# Altium PCB Lab6.PcbDoc
Units mil, origin at the board's own origin, x right, y up, seen from the top; angles counter-clockwise.
Board outline 1665 x 2270 mil, 2 copper layers (Top Layer, Bottom Layer); 68 components, 46 nets, 196 pads, 69 vias.
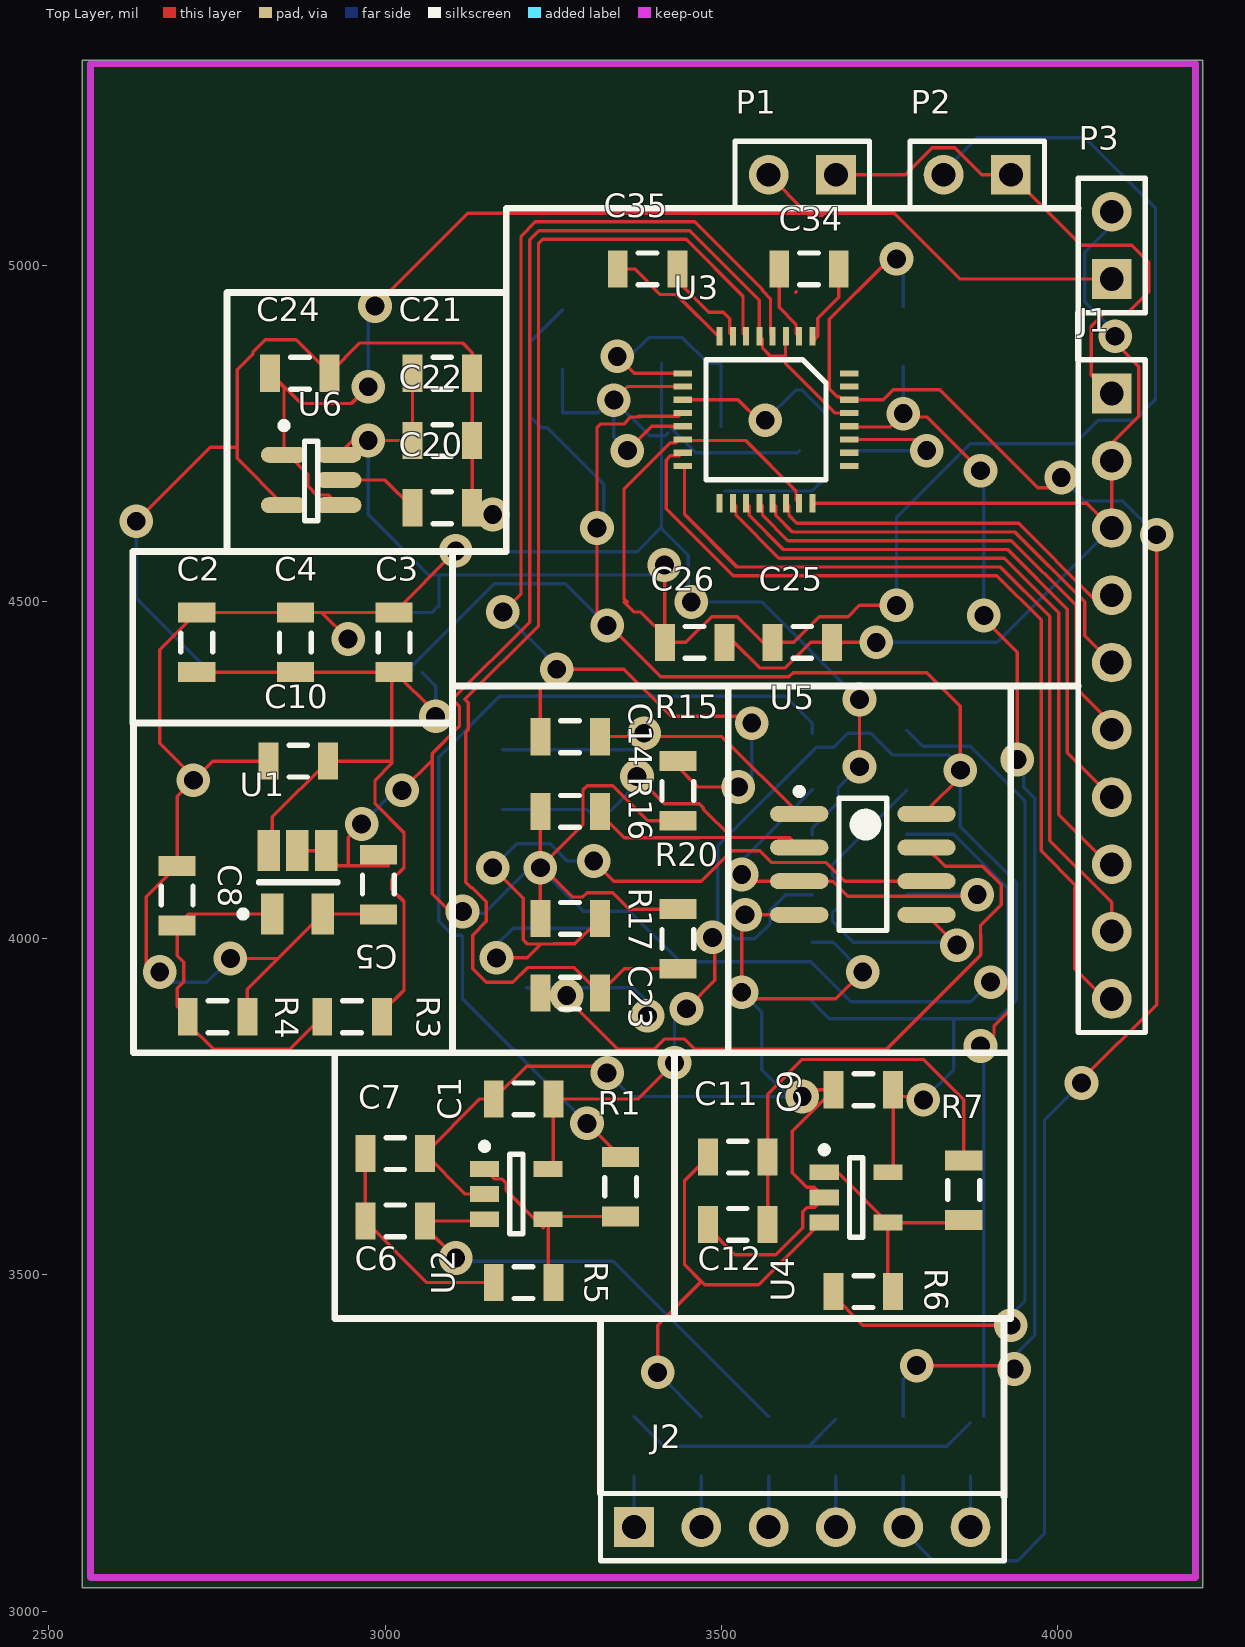
[diagram p0: Top Layer view]
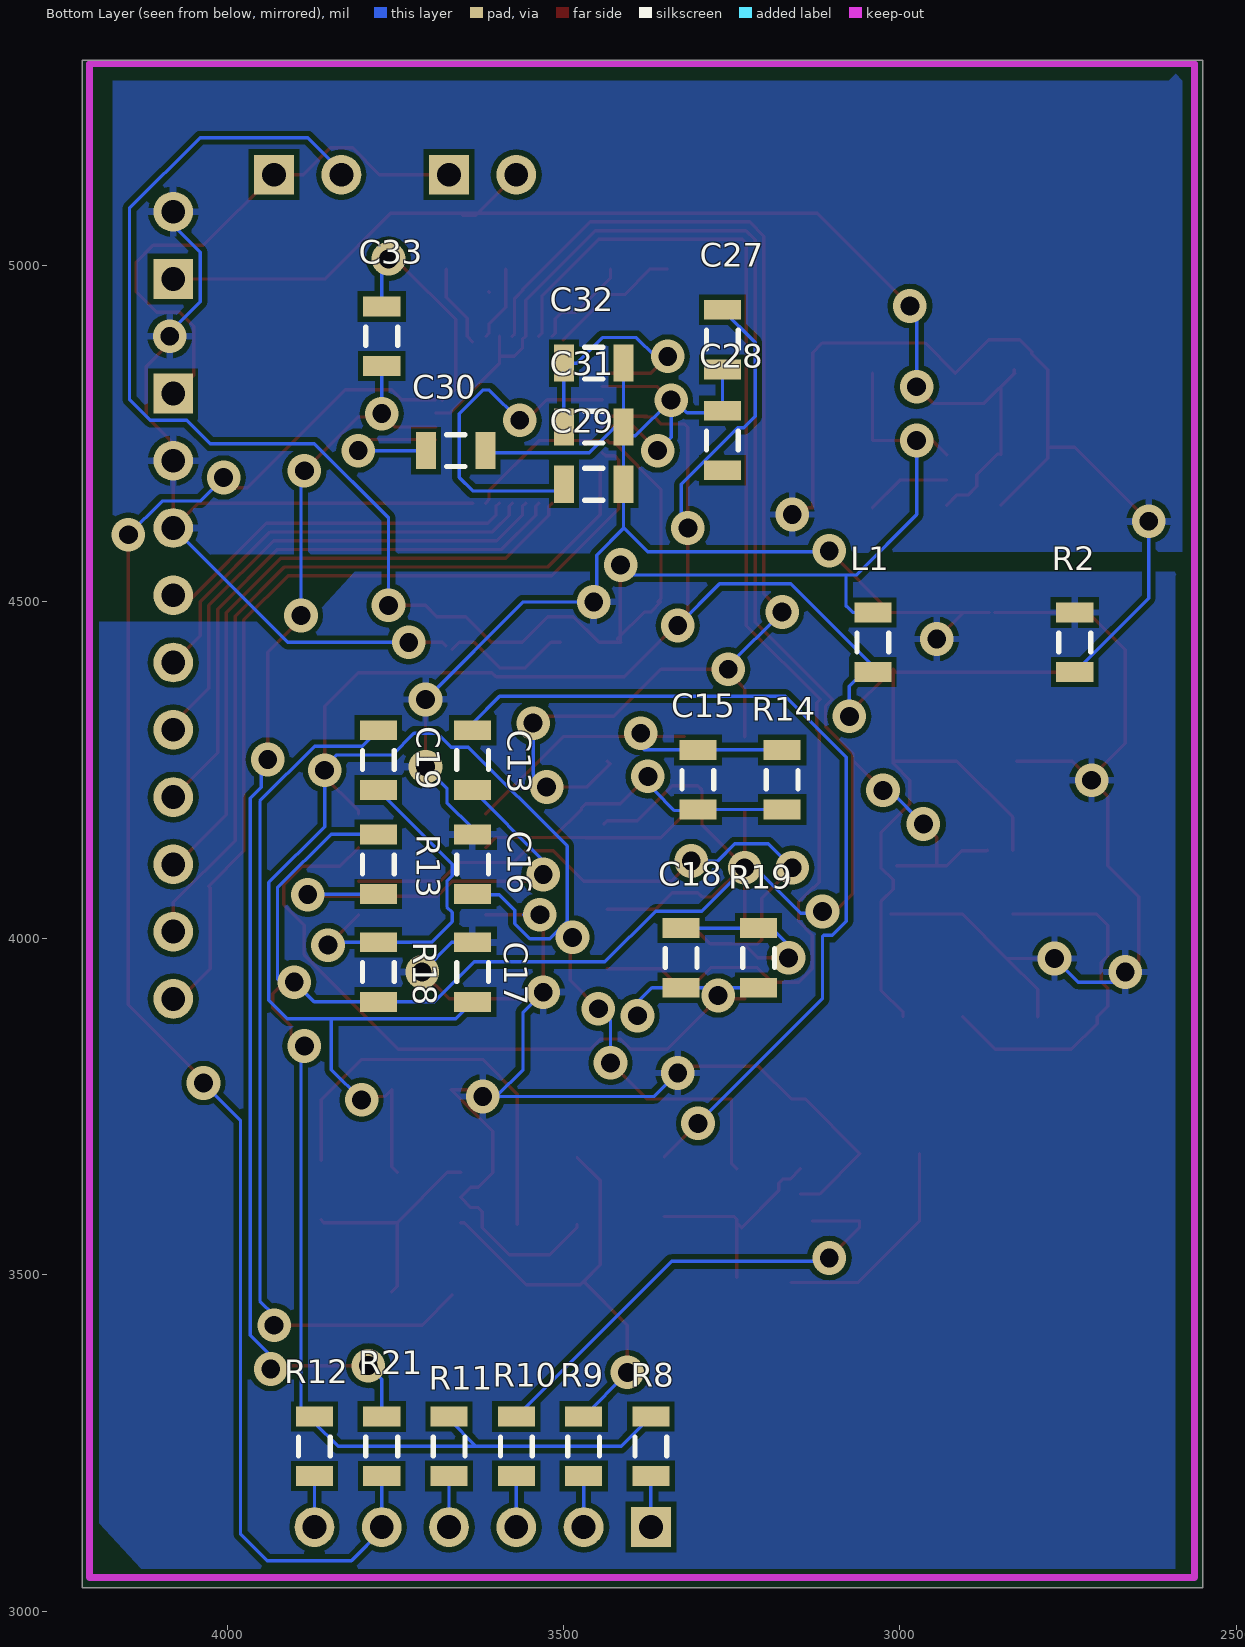
[diagram p1: Bottom Layer view, seen from below]

## Layer stack, top to bottom
Top Layer: signal copper 1.4
Dielectric: dielectric 12.6, FR-4, Dk 4.8
Bottom Layer: signal copper 1.4

## Board outline
2550,3035 2550,5305 4215,5305 4215,3035

## Design rules (kind name [scope] priority, off if disabled: settings)
Clearance [All] p1: gap=8
PolygonConnect [All] p1: connectstyle=Relief reliefconductorwidth=10 reliefentries=4 polygonreliefangle="90 Angle"
RoomDefinition Lab6 [InComponentClass('Lab6')] p1 off: confinementstyle=ConfineIn formatcopy=TRUE lockcomponents=FALSE outline 4045,2960 18430,2960 18430,4080 4045,4080
RoutingVias [All] p1: holewidth=25 width=40 viastyle="Through Hole" minholewidth=28 minwidth=50 maxholewidth=28 maxwidth=50
SilkscreenOverComponentPads [All] p1: minsilkscreentomaskgap=10
SolderMaskExpansion [All] p1: expansion=4
Width [All] p1: maxlimit=5 minlimit=5 preferedwidth=5
27 further rules are at their usual default settings.

## Components (designator, comment, footprint, x,y, rotation, side; value= is the part's Value field where it differs from the comment)
C1 "Cap_10n" SMD_0805 3205.83,3761.34 r0 top
C2 "Cap_10u" SMD_0805 2720,4440 r270 top
C3 "Cap_1u" SMD_0805 3013.33,4440 r270 top
C4 "Cap_100n" SMD_0805 2866.67,4440 r270 top
C5 "Cap_100n" SMD_0805 2990,4080 r90 top
C6 "Cap_100p" SMD_0805 3015,3580 r180 top
C7 "Cap_100p" SMD_0805 3015,3680 r180 top
C8 "Cap_100n" SMD_0805 2690.92,4063.53 r270 top
C9 "Cap_10n" SMD_0805 3710.83,3775 r0 top
C10 "Cap_100n" SMD_0805 2870.92,4263.53 r0 top
C11 "Cap_100p" SMD_0805 3524.17,3675 r0 top
C12 "Cap_100p" SMD_0805 3524.17,3575 r0 top
C13 "Cap_1u" SMD_0805 3635,4265 r90 bottom
C14 "Cap_470n" SMD_0805 3275,4299.65 r0 top
C15 "Cap_3n" SMD_0805 3300,4235.87 r90 bottom
C16 "Cap_1u" SMD_0805 3635,4110 r270 bottom
C17 "Cap_100n" SMD_0805 3635,3950 r270 bottom
C18 "Cap_3n" SMD_0805 3325,3970.87 r90 bottom
C19 "Cap_1u" SMD_0805 3775,4265 r90 bottom
C20 "Cap_10n" SMD_0805 3085,4640 r180 top
C21 "Cap_1u" SMD_0805 3085,4840 r180 top
C22 "Cap_100n" SMD_0805 3085,4740 r180 top
C23 "Cap_470n" SMD_0805 3275,3918.62 r180 top
C24 "Cap_1u" SMD_0805 2873.27,4840 r180 top
C25 "Cap_100n" SMD_0805 3620,4440 r180 top
C26 "Cap_1u" SMD_0805 3460,4440 r180 top
C27 "Cap_100n" SMD_0805 3263.62,4890 r90 bottom
C28 "Cap_1u" SMD_0805 3263.62,4740 r270 bottom
C29 "Cap_1u" SMD_0805 3455,4675 r0 bottom
C30 "Cap_1u" SMD_0805 3660,4725 r0 bottom
C31 "Cap_100n" SMD_0805 3455,4760 r0 bottom
C32 "Cap_10u" SMD_0805 3455,4855 r0 bottom
C33 "Cap_10n" SMD_0805 3770,4895 r270 bottom
C34 "Cap_4700p" SMD_0805 3630,4995 r180 top
C35 "Cap_4700p" SMD_0805 3390,4995 r180 top
J1 "HEADER 10" HDR1X10 4080,4810 r270 top
J2 "HEADER 6" HDR1X6 3370,3125 r0 top
L1 "Inductor (Ferrite Bead)" SMD_0805 3040,4440 r90 bottom
P1 "Jumper" HDR1X2 3670,5135 r180 top
P2 "Jumper" HDR1X2 3930,5135 r180 top
P3 "Bat header" HDR1X2 4080,4980 r90 top
R1 "Res_100" SMD_0805 3350,3630.83 r90 top
R2 "Res_0" SMD_0805 2740,4440 r270 bottom
R3 "Res_20K" SMD_0805 2950.92,3883.53 r180 top
R4 "Res_20K" SMD_0805 2750.92,3883.53 r0 top
R5 "Res_10K" SMD_0805 3205.83,3488.5 r0 top
R6 "Res_100" SMD_0805 3710.83,3475 r180 top
R7 "Res_10K" SMD_0805 3860,3625.83 r270 top
R8 "Res_20K" SMD_0805 3370,3245 r90 bottom
R9 "Res_100" SMD_0805 3470,3245 r90 bottom
R10 "Res_100" SMD_0805 3570,3245 r90 bottom
R11 "Res_20K" SMD_0805 3670,3245 r90 bottom
R12 "Res_20K" SMD_0805 3870,3245 r90 bottom
R13 "Res_1M" SMD_0805 3775,4110 r270 bottom
R14 "Res_560K" SMD_0805 3175,4235.87 r90 bottom
R15 "Res_470K" SMD_0805 3435,4219.13 r90 top
R16 "Res_10K" SMD_0805 3275,4188.62 r0 top
R17 "Res_10K" SMD_0805 3275,4029.65 r0 top
R18 "Res_1M" SMD_0805 3775,3950 r270 bottom
R19 "Res_560K" SMD_0805 3210,3970.87 r90 bottom
R20 "Res_470K" SMD_0805 3435,3999.13 r90 top
R21 "Res_390K" SMD_0805 3770,3245 r90 bottom
U1 "LMV321" MAA05A_M 2870.92,4083.53 r90 top
U2 "MAX4250EUK-T" SOT23-5_L 3195,3620 r0 top
U3 "ADS1292" ADS1292_PQFP32 3635,4895 r270 top
U4 "MAX4250EUK-T" SOT23-5_L 3700,3615 r0 top
U5 "TLC2262" TLC2262_SOIC8 3710,4110 r0 top
U6 "NCV8570B" TSOP-5_483-02 2890,4680 r0 top

## Footprints (in the part's own frame and the unit in brackets; to place one, negate y for a bottom-side part, rotate by r counter-clockwise, add the part's x,y. Pads: shape width x height; smd on the part's side, far side on the other; paste and mask are expansions set on the pad)
ADS1292_PQFP32 [mm]
  rect 0.7x0.23 smd: 1(0,0) 2(0,-0.5) 3(0,-1) 4(0,-1.5) 5(0,-2) 6(0,-2.5) 7(0,-3) 8(0,-3.5) 17(6.3,-3.5) 18(6.3,-3) 19(6.3,-2.5) 20(6.3,-2) 21(6.3,-1.5) 22(6.3,-1) 23(6.3,-0.5) 24(6.3,0)
  rect 0.23x0.7 smd: 9(1.4,-4.9) 10(1.9,-4.9) 11(2.4,-4.9) 12(2.9,-4.9) 13(3.4,-4.9) 14(3.9,-4.9) 15(4.4,-4.9) 16(4.9,-4.9) 25(4.9,1.4) 26(4.4,1.4) 27(3.9,1.4) 28(3.4,1.4) 29(2.9,1.4) 30(2.4,1.4) 31(1.9,1.4) 32(1.4,1.4)
  silkscreen extent 0.88,-4.01 5.41,0.52
HDR1X2 [mm] "Connector; Header; 2 Position"
  rect 1.5x1.5 hole 0.9: 1(0,0)
  round 1.5 hole 0.9: 2(2.54,0)
  silkscreen extent -1.27,-1.27 3.81,1.27
HDR1X6 [mm] "Connector; Header; 6 Position"
  rect 1.5x1.5 hole 0.9: 1(0,0)
  round 1.5 hole 0.9: 2(2.54,0) 3(5.08,0) 4(7.62,0) 5(10.16,0) 6(12.7,0)
  silkscreen extent -1.27,-1.27 13.97,1.27
HDR1X10 [mm] "Connector; Header; 10 Position"
  rect 1.5x1.5 hole 0.9: 1(0,0)
  round 1.5 hole 0.9: 2(2.54,0) 3(5.08,0) 4(7.62,0) 5(10.16,0) 6(12.7,0) 7(15.24,0) 8(17.78,0) 9(20.32,0) 10(22.86,0)
  silkscreen extent -1.27,-1.27 24.13,1.27
MAA05A_M [mm] "TSOP, 5-Leads, Body 3.0x1.7mm (max), Pitch 0.95mm, IPC Medium Density"
  rect 1.55x0.85 smd: 1(-1.2,0.984) 2(-1.2,-0.921) 3(1.2,-1.048) 4(1.2,0.032) 5(1.2,1.111)
  silkscreen extent -1.32,-1.5 0.02,2.21, body extent -1.14,-1.65 1.27,1.78, height 1.19
SMD_0805 [mm] "Chip Capacitor, 2-Leads, Body 2.0x1.3mm, IPC Medium Density"
  rect 0.75x1.4 smd: 1(-1.125,0) 2(1.125,0)
  silkscreen extent -0.35,-0.6 0.35,0.6, body extent -1.65,-0.89 1.65,0.89, height 1
SOT23-5_L [mm] "SOT23, 5-Leads, Body 3.0x3.0mm (max), Pitch 0.95mm, IPC Medium Density"
  rect 1.1x0.6 smd: 1(-1.2,0.95) 2(-1.2,0) 3(-1.2,-0.95) 4(1.2,-0.95) 5(1.2,0.95)
  silkscreen extent -1.32,-1.5 0.25,1.92, body extent -0.87,-1.5 0.87,1.5, height 1.45
TLC2262_SOIC8 [mm] "SOIC, 8-Leads, Body 5.0x4.0mm (max), Pitch 1.27mm, IPC Medium Density"
  oval 2.2x0.6 smd: 1(-2.4,1.905) 2(-2.4,0.635) 3(-2.4,-0.635) 4(-2.4,-1.905) 5(2.4,-1.905) 6(2.4,-0.635) 7(2.4,0.635) 8(2.4,1.905)
  silkscreen extent -2.52,-2.5 0.9,2.88, body extent -2.41,-2.67 2.29,2.54, height 1.75
TSOP-5_483-02 [mm] "TSOP, 5-Leads, Body 3.0x1.5mm (max), Pitch 0.95mm, IPC Medium Density"
  oval 1.75x0.6 smd: 1(-1.025,0.983) 2(-1.025,-0.917) 3(1.025,-0.917) 4(1.025,0.033) 5(1.025,0.983)
  silkscreen extent -1.15,-1.5 0.25,2.21, body extent -1.14,-1.78 1.65,1.78, height 1.1

## Part data
C1 C2 C3 C4 C5 C6 C7 C8 C9 C10 C11 C12 C13 C14 C15 C16 C17 C18 C19 C20 C21 C22 C23 C24 C25 C26 C27 C28 C29 C30 C31 C32 C33 C34 C35: library part "Cap Semi", "Capacitor (Semiconductor SIM Model)"
L1: library part Inductor, "Inductor"
P1 P2 P3: library part "Header 2", "Header, 2-Pin"
R1 R6: library part Res3, "R_subject_decouple"
R2 R3 R4 R5 R7 R8 R9 R10 R11 R12 R13 R14 R15 R16 R17 R18 R19 R20 R21: library part Res3, "Resistor"
U2 U4: "SOT23, Single-Supply, Low-Noise, Low-Distortion, Rail-to-Rail Op Amp"

## Via types
v1: diameter 50, hole 28, Top Layer to Bottom Layer, 69 vias

## Nets (pads, with @x,y where several pads share a name; then routed paths per layer and width w, separated by ;. In a path a pad name is that pad's centre, name@x,y a point inside that pad or via, vN(x,y) a via of type N, cw(c..) or ccw(c..) an arc to the next point about the centre after c; other vN are vias at no path point)
ADC_1INP: C14.1 R15.2 U3.4 | length 1834.9
  Top Layer w5: v1(3175,4485) 3202,4512 3202,5043.77 3223.23,5065 3460,5065 3560.44,4964.56 3560.44,4963.09 3572.71,4950.83 3572.71,4898.24 U3.4 ; C14.1 3230.71,4370.71 v1@3260,4400 ; v1(3255,4400) v1@3260,4400 ; R15.2@3430,4260 3465,4225 v1(3525,4225) ; R15.2@3431.57,4260 R15.2 ; v1(3545,4320) 3535,4330 3425,4330 3355,4400 v1@3260,4400
  Bottom Layer w5: v1(3175,4485) 3255,4405 v1(3255,4400) ; v1(3525,4225) 3540,4225 3545,4230 v1(3545,4320)
ADC_2INP: C23.1 R20.1 U3.6 | length 1905.1
  Top Layer w5: R20.1 3355.51,3954.84 C23.1 3281.23,3956.68 3211.6,3956.68 3189.91,3935 3150,3935 3130,3955 3130,4004.8 3150.5,4025.3 3150.5,4054.7 3129.7,4075.5 3127.68,4075.5 3120,4083.18 3120,4306.41 3123.5,4309.91 3123.5,4350.09 3118.49,4355.1 3228,4464.62 3228,5033 3234,5039 3447.46,5039 3531.92,4954.55 3531.92,4899.66 U3.6
ADC_CS: J1.8 U3.18 | length 964.2
  Top Layer w5: U3.18 3521.55,4642.31 3521.55,4628.84 3585.39,4565 3920,4565 4000.97,4484.03 4000.97,4184.03 J1.8@4075,4110
ADC_DIN: J1.7 U3.19 | length 850.2
  Top Layer w5: U3.19 3541.23,4642.31 3541.23,4628.84 3592.07,4578 3925.38,4578 4013.97,4489.41 4013.97,4276.03 J1.7@4075,4215
ADC_DOUT: J1.5 U3.21 | length 639.5
  Top Layer w5: U3.21 3580.6,4642.31 3580.6,4628.84 3605.44,4604 3936.15,4604 4039.97,4500.18 4039.97,4450.03 J1.5
ADC_DRDY: J1.4 U3.22 | length 546.1
  Top Layer w5: U3.22 3600.29,4642.31 3600.29,4628.84 3612.13,4617 3941.54,4617 4053.54,4505 J1.4@4075,4505
ADC_PGA1N: C34.1 U3.1 | length 124.1
  Top Layer w5: U3.1@3635.38,4887 3643,4894.62 3643,4921.38 3674.29,4952.68 C34.1
ADC_PGA1P: C34.2 U3.2 | length 112.1
  Top Layer w5: C34.2 3585.71,4938.08 3610.66,4913.13 3610.66,4899.34 U3.2@3615,4895
ADC_PGA2N: C35.1 U3.7 | length 148.6
  Top Layer w5: C35.1@3430,4995 3430,4981.89 3481.09,4930.8 3502.59,4930.8 3512.23,4921.15 3512.23,4899.66 U3.7
ADC_PGA2P: C35.2 U3.8 | length 197.8
  Top Layer w5: C35.2 3370.97,4995 3409.03,4956.94 3433.06,4956.94 U3.8@3500,4890
ADC_RLDIN: C33.2 R21.2 U3.28 | length 1909.3
  Top Layer w5: U3.28@3690,4760 3750,4760 v1(3770,4780) ; v1@3780,4775 3805.2,4775 3885,4695.2 v1(3885,4695) ; v1(3790,3365) 3930,3365 v1(3935,3360) ; v1(3890,4480) 3890,4475 3939.47,4425.53 v1(3939.47,4265.94)
  Bottom Layer w5: R21.2 3770,3345 v1(3790,3365) ; v1(3770,4780) C33.2 ; v1(3885,4695) 3890,4690 v1(3890,4480) ; v1(3935,3360) 3935,3379.8 3965.5,3410.3 3965.5,4208.09 3949.29,4224.29 3949.29,4256.11 v1(3939.47,4265.94)
ADC_RLDOUT: C33.1 J2.5 R21.1 U3.30 | length 2761.6
  Top Layer w5: U3.30@3680,4800 3674.83,4805.17 3671.99,4805.17 3660,4817.16 3660,4920 v1@3740,5000 ; U3.30 3740.31,4800.51 3755.3,4815.5 3824.5,4815.5 3970,4670 3990,4670 v1(4005,4685) ; v1@4035,3790 4146.61,3901.61 v1(4146.61,4600)
  Bottom Layer w5: v1@3740,5000 3739.29,4999.29 3745.71,4999.29 3765.71,4999.29 3770,4995 C33.1 ; J2.5@3770,3120 3815,3075 3940,3075 3980,3115 3980,3730 v1(4035,3785) ; J2.5@3770,3130 R21.1 ; v1(4005,4685) 4039.97,4650.03 4096.58,4650.03 v1(4146.61,4600)
  other v1: 3760,5010
ADC_RST: J1.10 U3.15 | length 1353.4
  Top Layer w5: U3.15 3437.43,4717.11 3423.96,4717.11 3417.81,4710.96 3417.81,4638.81 3517.62,4539 3909.23,4539 3974.97,4473.26 3974.97,4130 4027.49,4077.49 4025,4075 4025,3955 J1.10@4075,3905 ; J1.10@4080,3905 J1.10@4080,3920
ADC_SCLK: J1.6 U3.20 | length 748.4
  Top Layer w5: U3.20 3560.92,4642.31 3560.92,4628.84 3598.76,4591 3930.77,4591 4026.97,4494.8 4026.97,4372.03 4080,4319 J1.6
ADC_STRT: J1.9 U3.16 | length 1182.4
  Top Layer w5: U3.16@3445,4700 3445,4630 3523,4552 3914.62,4552 3987.97,4478.64 3987.97,4145.42 4080,4053.39 J1.9
ADC_VCAP1: C29.2 U3.11 | length 512
  Top Layer w5: U3.11 3524.49,4800.51 3555,4770 v1(3565,4770)
  Bottom Layer w5: C29.2@3505,4665 3635,4665 3655,4685 3655,4780 3620,4815 3610,4815 v1(3565,4770)
ADC_VCAP2: C30.2 U3.27 | length 225.5
  Top Layer w5: U3.27@3692.28,4739.29 U3.27 3788.54,4741.46 v1(3805,4725)
  Bottom Layer w5: C30.2 v1(3805,4725)
ADC_VREFP: C31.2 C32.2 U3.9 | length 391.1
  Top Layer w5: v1(3345,4865) 3370.12,4839.88 U3.9 U3.9@3434.41,4839.88
  Bottom Layer w5: v1(3345,4865) 3363.54,4865 3391.6,4893.06 3441.94,4893.06 3480,4855 C32.2 C31.2@3499.29,4760.71
ANALOG_GND: C1.1 C2.1 C3.1 C4.1 C5.1 C7.1 C8.1 C9.1 C10.1 C12.1 C16.1 C17.1 C27.1 C28.1 C29.1 C30.1 C31.1 C32.1 R2.1 R4.2 U1.2 U2.2 U3.10 U3.13 U4.2 U5.4 | length 5680.3
  Top Layer w5: v1(2665,3950) 2650,3950 2645,3955 2645,4061.9 C8.1 2690.92,4210.92 v1(2715,4235) v1@2717.5,4237.5 ; v1@2720,4235 v1@2717.5,4237.5 ; v1(2770,3970) 2839.1,3970 2839.99,3969.11 ; R4.2 2795.21,3924.33 2839.99,3969.11 ; C10.1 2743.53,4263.53 v1@2717.5,4237.5 ; C4.1@2859.29,4484.29 C2.1 2665,4429.29 2665,4290 v1@2717.5,4237.5 ; C4.1 2905.71,4484.29 ; v1(2945,4445) 2905.71,4484.29 ; C5.1@3013.87,4036.29 U1.2 2839.99,3969.11 ; v1(3105,4575.96) C3.1 2905.71,4484.29 ; U2.2 3119.29,3620 C7.1 3140.63,3761.34 C1.1 3210.2,3810 3315,3810 3325,3800 v1(3330,3800) ; v1(3340,4800) 3360.2,4820.2 U3.10 ; v1(3360,4725) 3396.14,4761.14 U3.13 ; C12.1 3479.88,3570.12 3520,3530 3580.64,3530 3620.6,3569.97 3620.6,3593.76 3626.75,3599.91 3637.67,3599.91 U4.2 3637.67,3630.09 3626.75,3630.09 3605,3651.84 3605,3713.46 C9.1 3630,3775 v1(3620,3765) ; v1@3525,3915 3530,3910 3670,3910 v1(3710,3950) ; v1(3530,3920) 3530,4020 v1@3540,4030 ; v1(3535,4035) U5.4 ; v1(3705,4255) v1(3705,4355)
  Bottom Layer w5: v1(2665,3950) 2680,3935 2735,3935 v1(2770,3970) ; v1(3105,4575.96) 3106.46,4574.5 3374.5,4574.5 3410,4610 ; C27.1 3263.62,4781.38 3316.38,4781.38 v1@3340,4805 ; v1(3330,3800) 3365,3765 v1@3600,3765 ; v1@3340,4795 3340,4745 v1(3360,4725) ; v1(3340,4800) 3393,4747 3416.09,4747 C31.1@3419.9,4750.81 ; C32.1 C31.1 C29.1 3410.71,4609.5 3450.5,4569.7 3450.5,4500 v1(3455,4500) 3560,4500 v1(3705,4355) ; C31.1@3423.71,4760 3461.77,4721.94 3612.65,4721.94 C30.1 ; v1(3530,3920) 3560,3890 3560,3805 v1@3600,3765 ; v1(3535,4035) v1@3559.29,4035 ; v1(3620,3765) v1@3600,3765 ; C16.1 3635,4163.54 3673.06,4201.6 3673.06,4223.06 v1(3705,4255) ; C17.1@3655.71,3994.29 C17.1 3665.71,3994.29 v1(3710,3950)
AVDD: C1.2 C2.2 C3.2 C4.2 C9.2 C10.2 C16.2 C17.2 C27.2 C28.2 L1.1 R3.1 U1.5 U2.5 U3.12 U4.5 U5.8 | length 5593.2
  Top Layer w5: C2.2 C4.2 3005.71,4395.71 3010,4400 3010,4263.53 ; U1.5@2832.17,4130.78 2832.17,4180.49 C10.2 3010,4263.53 ; R3.1 2995.21,3890.21 3028.06,3923.06 3028.06,4054.82 3010,4072.88 3010,4087.12 3028.06,4105.18 3028.06,4157.15 2985,4200.2 2985,4235 3010,4260 3010,4263.53 ; C3.2 3014.29,4395.71 3075,4335 v1(3075,4330) ; U2.5 3250.12,3665.28 C1.2 3376.34,3761.34 v1(3430,3815) ; v1(3315,4610) v1@3320,4610 ; 3376.17,4776.17 3436.17,4776.17 U3.12@3440,4780 ; 3380,4775 3365.2,4775 3354.7,4764.5 3319.5,4764.5 3315,4760 3315,4483.54 3409.6,4388.94 3600.21,4388.94 3606.27,4395 3805,4395 3855,4345 v1(3855,4250) 3860,4245 3804.49,4189.49 U5.8 ; v1(3448,3895.5) 3490,3937.5 3490,3997.98 v1(3486.49,4001.49) ; U4.5 3755.12,3660.28 C9.2 3765.12,3765 3795,3765 v1(3800,3760)
  Bottom Layer w5: L1.1 3040,4405 3162,4527 3268,4527 v1(3330,4465) ; L1.1@3055,4395 3075,4375 3075,4350 3075,4335 v1(3075,4330) ; C27.2 3215,4885.67 3215,4775.74 3231.71,4759.03 3240.97,4759.03 3325,4675 3325,4620 v1(3315,4610) ; v1(3430,3815) 3430,3877.5 v1(3448,3895.5) ; v1(3486.49,4001.49) 3499.9,4014.9 v1@3504.9,4014.9 ; C17.2 3660.26,3880.44 3910.44,3880.44 3938,3908 3938,4083.12 3855,4166.12 v1(3855,4250) 3855,4255 3837.5,4272.5 3754.62,4272.5 3722.12,4305 3687.88,4305 3666.91,4284.03 3641.15,4284.03 3494.5,4137.38 3494.5,4025.3 v1@3504.9,4014.9 ; C16.2@3635,4065 3595.5,4065 3572.29,4041.79 3572.29,4022.09 3549.7,3999.5 3520.3,3999.5 v1@3504.9,4014.9 ; v1(3800,3760) 3845,3805 3845,3880
DIGITAL_GND: C20.1 C21.1 C22.1 C24.1 C25.1 C26.1 J1.2 J1.3 P3.2 R2.2 U3.24 U6.2 | length 3076.5
  Top Layer w5: v1(2630,4620) 2740,4730 2780,4730 ; U6.2 2780,4713.54 2780,4845 2803.71,4868.71 2803.71,4871.91 2821.8,4890 2867.56,4890 C24.1 2962.56,4885 3115,4885 3129.29,4870.71 C21.1 C22.1 C20.1 3170,4640 v1(3160,4630) ; C26.1 3518.54,4440 3556.6,4401.94 3594.82,4401.94 3632.88,4440 3655,4440 C25.1@3665,4430 ; U3.24 4043.03,4646.97 4075,4615 4085,4615 4080,4620 J1.2@4080,4705 ; C25.1@3675,4435 3680,4440 v1(3730,4440) ; J1.2 4080,4736.1 4120.03,4776.12 4120.03,4849.97 4085,4885 v1(4085,4895)
  Bottom Layer w5: v1(2630,4620) 2630,4505.71 R2.2 ; v1(3730,4440) 3910,4440 J1.3 ; P3.2@4080,5095 P3.2 4080,5060.06 4039.97,5020.03 4039.97,4946.12 4085,4901.1 v1(4085,4895)
DVDD: C21.2 C22.2 C25.2 C26.2 L1.2 P2.2 U3.14 U3.23 U6.5 | length 3265.6
  Top Layer w5: U6.5 2951.65,4740 v1(2975,4740) ; v1@2980,4745 v1(2975,4740) ; C21.2 C22.2 v1(2975,4740) ; 3355,4500 3370,4485 3380,4485 C26.2@3420,4445 ; 3360,4500 3355,4505 3355,4667.84 3423.96,4736.8 3431.8,4736.8 U3.14@3435,4740 ; C26.2@3415,4440 C26.2 ; v1(3415,4555) 3415.71,4554.29 C26.2 ; U3.14@3440,4740 3535.76,4740 3610.66,4665.1 3610.66,4651.63 U3.23 ; v1(3760,4495) 3705,4495 3688.06,4478.06 3645.18,4478.06 3607.12,4440 C25.2 3561.46,4440 3523.4,4478.06 3485.18,4478.06 3447.12,4440 C26.2
  Bottom Layer w5: v1(2975,4740) 2975,4630 3065,4540 3080,4540 ; L1.2 3069.29,4484.29 3079.29,4494.29 3080,4493.58 3080,4540 ; v1(3415,4555) 3400,4540 3090,4540 3080,4540 ; v1(3760,4495) 3760,4625 3870,4735 4025,4735 4059.97,4769.97 4113.88,4769.97 4145,4801.1 4145,5085 4040,5190 3880,5190 P2.2@3830,5140
DVDD_IN: J1.1 P1.1 P2.1 | length 818
  Top Layer w5: P1.1 3773.39,5135 3813.42,5175.03 3846.58,5175.03 3886.61,5135 P2.1 4035,5030 4110,5030 4135,5005 4135,4961.1 4104.4,4930.5 4070.3,4930.5 4049.5,4909.7 4049.5,4837.03 4075,4811.53 J1.1@4075,4805
MAX1_OUT: R1.1 R5.2 U2.1 U2.4 | length 335.6
  Top Layer w5: U2.1 3162.85,3642.31 3173.76,3642.31 3179.91,3636.16 3179.91,3625.25 3235.16,3570 U2.4@3242.24,3577.09 ; R5.2@3242.24,3496.38 U2.4@3242.24,3577.09 ; R1.1 3246.18,3586.54 U2.4 U2.4@3242.24,3577.09
MAX1_OUT2: C13.2 R1.2 | length 1338.7
  Top Layer w5: v1(3300,3725) 3300.12,3725 R1.2
  Bottom Layer w5: v1(3300,3725) 3115,3910 3115,4002.78 3113.28,4004.5 3100.3,4004.5 3079.5,4025.3 3079.5,4269.5 3170,4360 3595,4360 3635,4320 C13.2@3635,4305
MAX1_SGNL: C6.1 R10.2 U2.3 | length 707
  Top Layer w5: C6.1 C6.1@3060,3580 ; v1(3105,3525) 3060,3570 C6.1@3060,3580 ; U2.3@3130,3580 C6.1@3060,3580
  Bottom Layer w5: v1(3105,3525) 3110,3520 3339.29,3520 R10.2
MAX2_OUT: R6.1 R7.2 U4.1 U4.4 | length 345.7
  Top Layer w5: U4.1 3672.44,3652.4 U4.4 ; R6.1 3747.24,3482.87 U4.4 ; R7.2 3856.06,3577.6 U4.4
MAX2_OUT2: C19.2 R6.2 | length 1291.1
  Top Layer w5: R6.2@3665,3470 3710,3425 v1(3930,3425)
  Bottom Layer w5: C19.2 3798.79,4285.5 3869.7,4285.5 3951,4204.2 3951,3461 3930,3440 v1(3930,3425)
MAX2_SGNL: C11.1 R9.2 U4.3 | length 687.5
  Top Layer w5: v1(3405,3355) 3405,3425 3470,3490 ; C11.1 3445,3640.12 3445,3515 3470,3490 ; U4.3 3647.6,3577.6 3555,3485 3475,3485 3470,3490
  Bottom Layer w5: v1(3405,3355) 3405,3354.29 R9.2
NetC6_2: C6.2 C7.2 R5.1 | length 328.7
  Top Layer w5: C7.2 C6.2 3062.2,3488.5 R5.1
NetC8_2: C8.2 R3.2 R4.1 U1.1 | length 544.6
  Top Layer w5: U1.1 2707.97,4036.29 C8.2 2690.92,3974.28 2700.5,3964.7 2700.5,3935.3 2690.92,3925.72 2690.92,3899.24 R4.1 2706.63,3873.37 2745,3835 2858.1,3835 R3.2
NetC11_2: C11.2 C12.2 R7.1 | length 621.1
  Top Layer w5: C12.2 C11.2 3568.46,3768.46 3620,3820 3800,3820 3860,3760 R7.1
NetC13_1: C13.1 R13.2 U5.3 | length 623.1
  Top Layer w5: v1(3530,4095) 3540,4085 U5.3 3665,4085 3687.31,4062.69 3877.69,4062.69 v1(3880,4065)
  Bottom Layer w5: v1(3530,4095) v1@3535,4095 ; v1@3530,4115.71 C13.1 ; R13.2 3879.29,4065.71 v1(3880,4065)
NetC14_2: C14.2 C15.2 R14.2 U5.1 | length 589.3
  Top Layer w5: C14.2@3320,4300 v1@3390,4300 ; v1(3385,4305) v1@3390,4300 ; v1@3395,4295 v1@3390,4300 ; U5.1 3500.51,4300 v1@3390,4300
  Bottom Layer w5: R14.2 C15.2 3380.16,4280.16 3385,4285 v1(3385,4305)
NetC15_1: C15.1 R14.1 R16.2 U5.2 | length 728.6
  Top Layer w5: R16.2@3320,4185 3355.42,4149.58 3466.91,4149.58 3467.33,4150 3515,4150 ; v1(3374.44,4240.85) 3415.18,4200.11 3466.91,4200.11 3473.06,4193.96 3473.06,4191.94 3515,4150 ; U5.2 3600.51,4150 3515,4150
  Bottom Layer w5: R14.1 C15.1 ; C15.1@3306.57,4185 3301.57,4190 3335,4190 3365,4220 3365,4231.41 v1(3374.44,4240.85)
NetC18_1: C18.1 C23.2 R19.1 U5.7 | length 1214
  Top Layer w5: C23.2@3230.71,3910 v1@3265,3910 ; v1(3270,3915) v1@3265,3910 ; v1@3390,3895 v1@3390,3905 ; U5.7 3832.18,4107.31 3887.89,4107.31 3915.5,4079.7 3915.5,4050.3 3885,4019.8 3885,4005.2 3885.5,4004.7 3885.5,3975.3 3745.2,3835 3460.2,3835 3444.7,3850.5 3415.3,3850.5 3399.8,3835 3345.74,3835 3270.74,3910 v1@3265,3910
  Bottom Layer w5: R19.1 C18.1 3368.43,3926.57 v1@3390,3905
  other v1: 3390,3885
NetC18_2: C18.2 R17.2 R19.2 U5.6 | length 1233.4
  Top Layer w5: v1(3160,4105) 3205.44,4059.56 3205.44,3997.74 3211.6,3991.59 3249.82,3991.59 3250.36,3992.13 3282.13,3992.13 R17.2@3315,4025 ; v1(3165.5,3971.07) 3211.07,3971.07 3230,3990 ; v1(3310,4115) 3340,4085 3469.8,4085 3515.3,4130.5 3556.96,4130.5 3574.77,4112.69 3655.7,4112.69 3683.38,4085 U5.6
  Bottom Layer w5: v1(3160,4105) 3195.5,4140.5 3245.41,4140.5 3270.91,4115 v1(3310,4115) ; v1(3165.5,3971.07) 3165.5,3990.5 3190.16,4015.16 R19.2 C18.2
NetC19_1: C19.1 R18.1 U5.5 | length 510.9
  Top Layer w5: U5.5 3849.49,3990 v1(3850,3990)
  Bottom Layer w5: C19.1@3775,4220 3665,4110 3665,4092.88 3673.06,4084.82 3673.06,4046.6 3665,4038.54 3665,4025 3695.71,3994.29 3845.71,3994.29 v1(3850,3990)
NetC20_2: C20.2 U6.4 | length 127.5
  Top Layer w5: U6.4 2999.41,4681.3 C20.2
NetJ2_1: J2.1 R8.1 | length 75.7
  Bottom Layer w5: J2.1 R8.1
NetJ2_2: J2.2 R9.1 | length 75.7
  Bottom Layer w5: J2.2 R9.1
NetJ2_3: J2.3 R10.1 | length 75.7
  Bottom Layer w5: J2.3 R10.1
NetJ2_4: J2.4 R11.1 | length 75.7
  Bottom Layer w5: J2.4 R11.1
NetJ2_6: J2.6 R12.1 | length 75.7
  Bottom Layer w5: J2.6 R12.1
V_IN: C24.2 P1.2 P3.1 U6.1 U6.3 | length 1892.3
  Top Layer w5: C24.2 2849.65,4819.33 U6.1 ; C24.2@2830,4845 2830,4840 2875,4795 2950,4795 v1(2975,4820) ; U6.1@2850,4720 2854.25,4720 2885.41,4688.85 2885.41,4672.06 2898.48,4658.99 2915.26,4658.99 U6.3 ; v1(2985,4940) 3123,5078 3627,5078 ; P1.2 3627,5078 ; 3650,5075 3630,5075 3627,5078 ; P3.1@4080,4960 P3.1 ; P3.1@4080,4999.94 P3.1 ; 3627,5078 3757,5078 3855,4980 P3.1
  Bottom Layer w5: v1(2975,4820) 2975,4930 v1(2985,4940)
VGND: C5.2 R8.2 R11.2 R12.2 R13.1 R15.1 R16.1 R17.1 R18.2 R20.2 U1.3 U1.4 U3.3 U3.5 U3.29 | length 5355.5
  Top Layer w5: U1.4 2870.45,4130 2907.95,4130 2930.12,4107.82 2945,4107.82 ; v1(2965,4170) 2945,4150 2945,4107.82 ; 3005,4107.82 2945,4107.82 ; v1(3025,4220) 3070,4265 ; v1(3115,4040) 3096.17,4040 3070,4066.17 3070,4265 ; R17.1 v1(3230.71,4105) R16.1 ; v1@3235,4105 3278.45,4061.55 3294.03,4061.55 3300.18,4067.7 3338.4,4067.7 3362.68,4043.43 R20.2 ; v1@3235,4110 3294.03,4169.03 3294.03,4220.53 3300.18,4226.68 3338.4,4226.68 3390.24,4174.84 R15.1 R15.1@3439.84,4170 ; U3.3@3595,4895 3595,4865 ; U3.29 3669.17,4780.83 3595,4855 3595,4865 ; v1(3900,3935) 3915,3935 3932,3918 3932,3897 3905,3870 3905,3857 ; 3070,4265 3070,4274.8 3110.5,4315.3 3110.5,4344.7 3100.1,4355.1 3215,4470 3215,5038.38 3228.62,5052 3452.85,5052 3556.26,4948.59 U3.5 3560.92,4890.34 3560.92,4876.87 3572.79,4865 3595,4865
  Bottom Layer w5: v1(2965,4170) 3015,4220 v1(3025,4220) ; v1(3115,4040) 3117.67,4037.33 3147.33,4037.33 3215,4105 v1@3230,4105 ; v1(3230.71,4105) v1@3230,4105 ; R8.2 3414.29,3245 3625,3245 3630,3245 ; R11.2@3670,3285 3630,3245 ; R13.1@3775,4155 3845,4155 3925,4075 3925,3940 ; R12.2@3870,3280 3835,3245 3630,3245 ; v1(3885,3840) 3890,3835 R12.2@3890,3290 ; v1@3230,4105 3294.58,4040.42 3363.06,4040.42 3438.48,3965 3632.88,3965 3692.17,3905.71 R18.2 3870.71,3905.71 v1(3900,3935) ; v1(3900,3935) 3920,3935 3925,3940 ; v1(3900,3935) 3905,3940 3925,3940
pads on no net: U3.17 U3.25 U3.26 U3.31 U3.32
copper on no net: | length 1.4
  Top Layer w5: 3610,4960 3610.97,4960.97

## Polygon pours and split planes (outlines as drawn)
DIGITAL_GND on Bottom Layer "Bottom Layer-No Net" (solid, pour order 1001): 2580,4575 2580,5275 2590,5285 2600,5275 4170,5275 4170,4580 4160,4570
ANALOG_GND on Bottom Layer "Bottom Layer-No Net" (solid, pour order 1000): 2585,4545 2590.28,4539.27 2590.28,3045 4110.81,3045 4190,3130.88 4190,4470.57 3878.5,4470.57 3809.87,4545

## Keep-outs
Keep-Out Layer:
  lines w10: 2562.03,3050 2562.03,5300 4204.38,5300 4204.38,3050 2562.03,3050

## Silkscreen, mask and mechanical layers (free items; w line width, h text height)
Top Overlay:
  lines w10: 2925,3825 2925,3435 3430,3435 ; 3320,3175 3320,3430 ; 3425,3830 3430,3825 3430,3435 ; 3920,3170 3920,3430 ; 3925,4375 4030,4375 ; 4030,4860 4030,4930 ; 4030,5085 3180,5085 3180,4960 ; 3100,3830 3100,4375 3510,4375 ; 3100,3830 3510,3830 ; 3100,3830 2625.92,3830 2625.92,4320 3100,4320 ; 3100,3830 3100,4320 ; 3100,4320 2625,4320 2625,4575 3100,4575 3100,4320 ; 3180,4960 3180,4575 2765,4575 2765,4960 3180,4960 ; 3430,3435 3430,3830 3930,3830 ; 3430,3435 3930,3435 3930,3830 ; 3510,3830 3930,3830 ; 3510,3830 3510,4375 ; 3510,4375 3930,4375 3930,3830